# EAGLE board BLE -- HM-10 -- Carduino Breakout v1.0.2 (EAGLE 6.5.0)
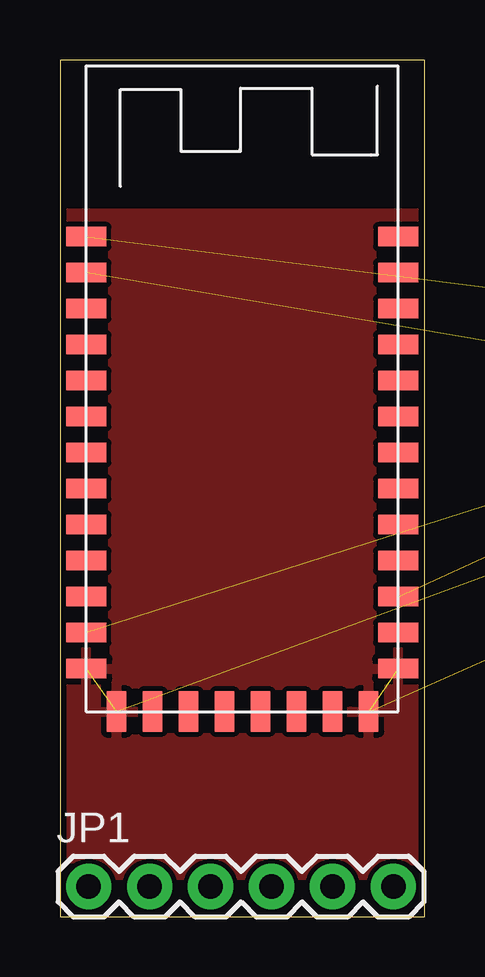
[diagram p0: board, top side]
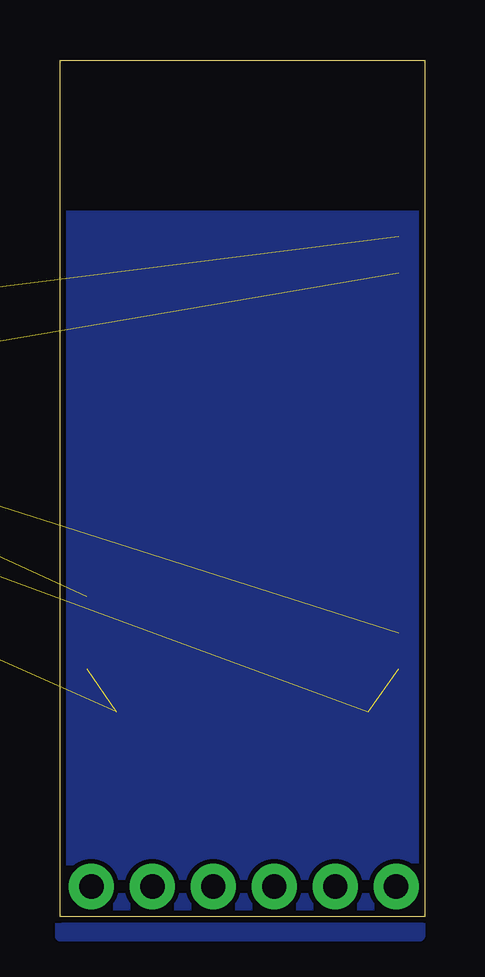
[diagram p1: board, bottom side, seen from below]

Size 15.2 x 35.7 mm. Coordinates in mm from the lower left corner, seen from the top.
Outline: 0,0 15.2,0 15.2,35.7 0,35.7 0,0
Copper layers (1*16): Top 0.035mm / dielectric 1.5mm / Bottom 0.035mm
Design rules "SparkFun (1)": minimum track width 8mil, minimum drill 20mil, track to track 8mil, track to pad 8mil, pad to pad 8mil, via to via 8mil, smd to smd 8mil, copper to edge 10mil, drill to drill 8mil, minimum pad ring 12mil, minimum via ring 10mil, stop-mask expansion 4mil, vias tented up to drill 25mil, thermal gap 10mil

## Footprints (pad centres in the part's own frame; a part is rotated, then mirrored left to right if it is on the bottom)
SOT23-3 = smd 0.8 x 0.9: 1 -0.95,-1; 2 0.95,-1; 3 0,1.1
C0805K = smd 1.3 x 1.6: 1 -1,0; 2 1,0
LED-0603 = smd 0.8 x 0.8: A 0,-0.75; C 0,0.75
1X06 = drill 1.016 pad 1.88: 1 0,0; 2 2.54,0; 3 5.08,0; 4 7.62,0; 5 10.16,0; 6 12.7,0
M0805 = smd 1.3 x 1.6: 1 -0.95,0; 2 0.95,0
SJ_2S-NO = smd 0.635 x 1.27: 1 -0.45,0; 2 0.45,0
SOT23-5 = smd 0.55 x 1.2: 1 -0.95,-1.3; 2 0,-1.3; 3 0.95,-1.3; 4 0.95,1.3; 5 -0.95,1.3
BLE-HM-10 = smd 1.676 x 0.813: 3.3V 0,3.29; AIO0 0,7.79; AIO1 0,6.29; GND1 0,1.79; GND4 13,1.79; PCM_CLK 0,13.79; PCM_IN 0,10.79; PCM_OUT 0,12.29; PCM_SYNC 0,9.29; PIO0 13,3.29; PIO1 13,4.79; PIO2 13,6.29; PIO3 13,7.79; PIO4 13,9.29; PIO5 13,10.79; PIO6 13,12.29; PIO7 13,13.79; PIO8 13,15.29; PIO9 13,16.79; PIO10 13,18.29; PIO11 13,19.79; RESET 0,4.79; UART_CTS 0,16.79; UART_RTS 0,15.29; UART_RX 0,18.29; UART_TX 0,19.79 | smd 0.813 x 1.676: GND2 1.27,0; GND3 11.77,0; SPI_CLK 8.77,0; SPI_CSB 4.27,0; SPI_MISO 7.27,0; SPI_MOSI 5.77,0; USB_D+ 10.27,0; USB_D- 2.77,0

## Placement (x,y rotation side)
BSS138  MOSFET-NCHANNELSMD  [SOT23-3]  63.56,19.34 180 bottom  (outside the outline)
C1  1uF  [C0805K]  64.05,25.6 270 bottom  (outside the outline)
C2  1uF  [C0805K]  57.53,23.8 270 bottom  (outside the outline)
CONN_LED  [LED-0603]  63.24,35.12 180 bottom  (outside the outline)
JP1  [1X06]  1.19,1.26 0 top
R1  1k  [M0805]  59.13,31.85 270 bottom  (outside the outline)
R2  1k  [M0805]  61.15,31.87 270 bottom  (outside the outline)
R3  10k  [M0805]  55.3,19.57 180 bottom  (outside the outline)
R4  20k  [M0805]  57.24,17.42 180 bottom  (outside the outline)
R5  10k  [M0805]  64.58,16.47 180 bottom  (outside the outline)
R6  10k  [M0805]  60.62,21.48 90 bottom  (outside the outline)
R7  220  [M0805]  63.23,31.88 90 bottom  (outside the outline)
RX_LED  [LED-0603]  61.36,35.14 0 bottom  (outside the outline)
SJ1  SOLDERJUMPERNO  [SJ_2S-NO]  59.39,25.58 90 bottom  (outside the outline)
TX_LED  [LED-0603]  59.46,35.12 0 bottom  (outside the outline)
U1  V_REG_LDOSMD  [SOT23-5]  61.55,25.25 180 bottom  (outside the outline)
U$1  BLE-HM-10  [BLE-HM-10]  1.09,8.55 0 top
U$3  [OSHW_FILLX70_NOTEXT]  51.57,33.58 0 top  (outside the outline)

## Library data of the parts
BSS138 CONN_LED RX_LED SJ1 TX_LED U1 = SparkFun
C1 C2 R1-R7 = resistor
JP1 = SparkFun-Connectors
U$1 = Random parts
U$3 = ohw-logo

## Nets
3_3V: BSS138.1 C2.1 R1.2 R2.2 R6.2 SJ1.1 U1.5 U$1.3.3V
5V: C1.1 R5.2 SJ1.2 U1.1 U1.3
GND: C1.2 C2.2 R4.2 R7.1 U1.2 U$1.GND1 U$1.GND2 U$1.GND3 U$1.GND4
HVTX->LVRX: R3.2 R4.1 U$1.UART_RX
LVRX->HVTX: BSS138.2 R6.1 U$1.UART_TX
N$2: CONN_LED.A U$1.PIO1
N$3: U$1.RESET
N$24: R1.1 TX_LED.A
N$26: CONN_LED.C R7.2
N$27: R2.1 RX_LED.A
RX: R3.1 RX_LED.C
TX: BSS138.3 R5.1 TX_LED.C

## Tracks (layer width: path | path; a pad name or v marks a point on that pad's centre or on a via)
3_3V  (7 unrouted)
5V  (4 unrouted)
GND  (8 unrouted)
  pour Bottom: 0.2,-0.83 15.2,-0.83 15,29.24 0.2,29.24
  pour Top: 0.25,29.3 0.05,-0.82 15.2,-0.82 15,29.3
HVTX->LVRX  (2 unrouted)
LVRX->HVTX  (2 unrouted)
N$2  (1 unrouted)
N$24  (1 unrouted)
N$26  (1 unrouted)
N$27  (1 unrouted)
RX  (1 unrouted)
TX  (2 unrouted)

## Text on the board
tNames: D+ | CLK | MISO | MOSI | CSB | G | D- | G | HM-10 / THIS SIDE FACES / BREADBOARD
bNames: TX | RX | CONN | 0 | 3.3V | 1 | RES | 470 | 2 | 470 | 470 | A1 | 3 | A0 | HM-10 BREAKOUT v.9.9 / THOMAS BRITTAIN / LETSMAKEROBOTS.COM | 1uF | 4 | 3.3v | 1uF | 5 | 10k | 10k | 6 | DC | BSS138 | 7 | DD | 20k | 10k | 8 | RT | 9 | CT | 10 | RX | 11 | carduino.co.uk | TX